# EAGLE board lia_teardrops (EAGLE 6.1), part 1 of 2
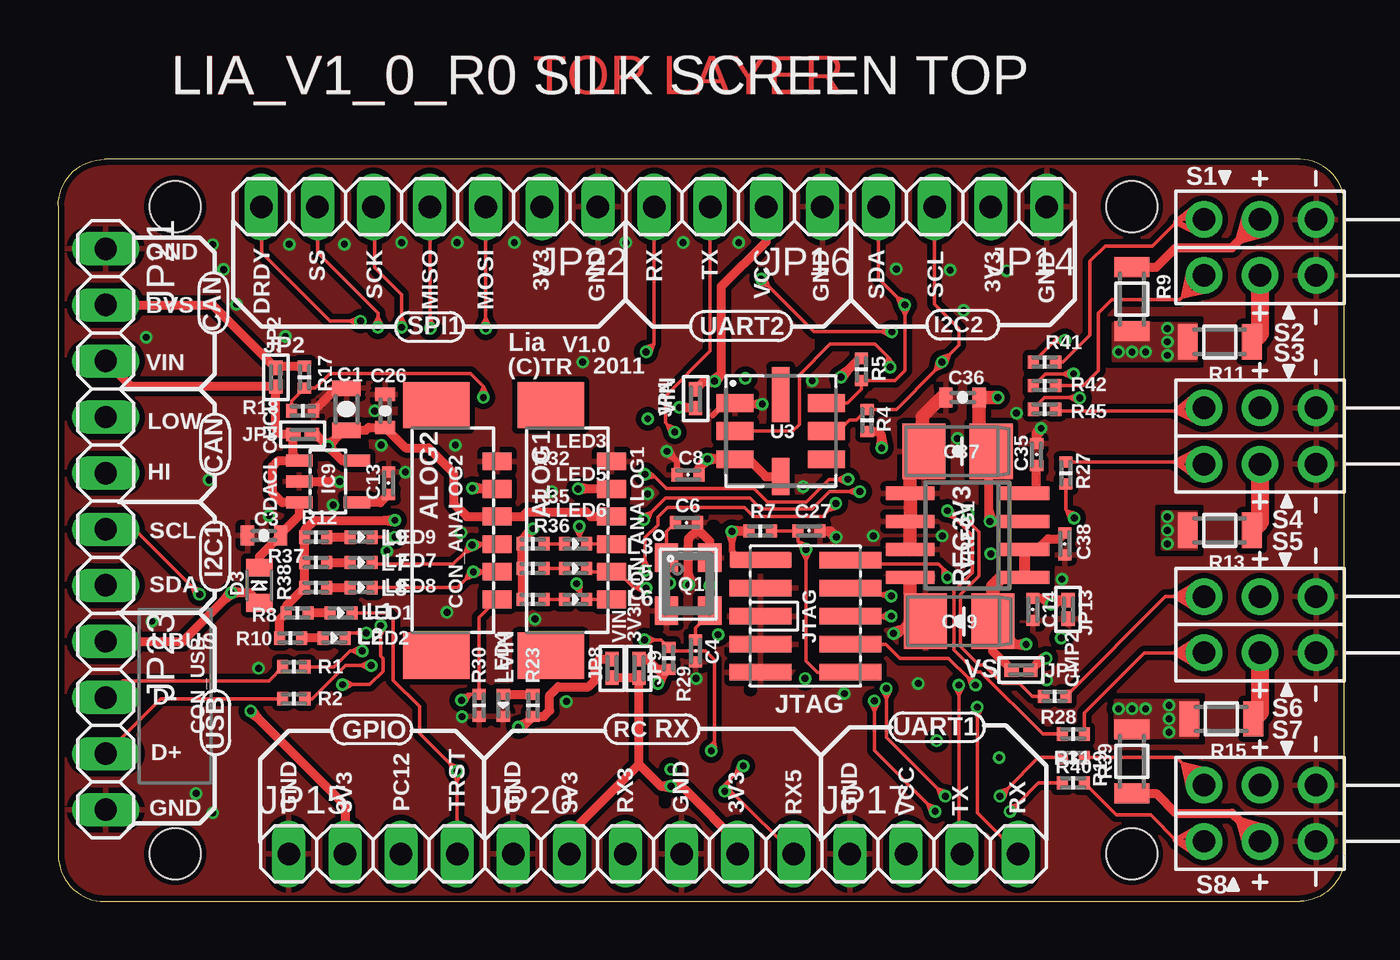
[diagram p0: board, top side]
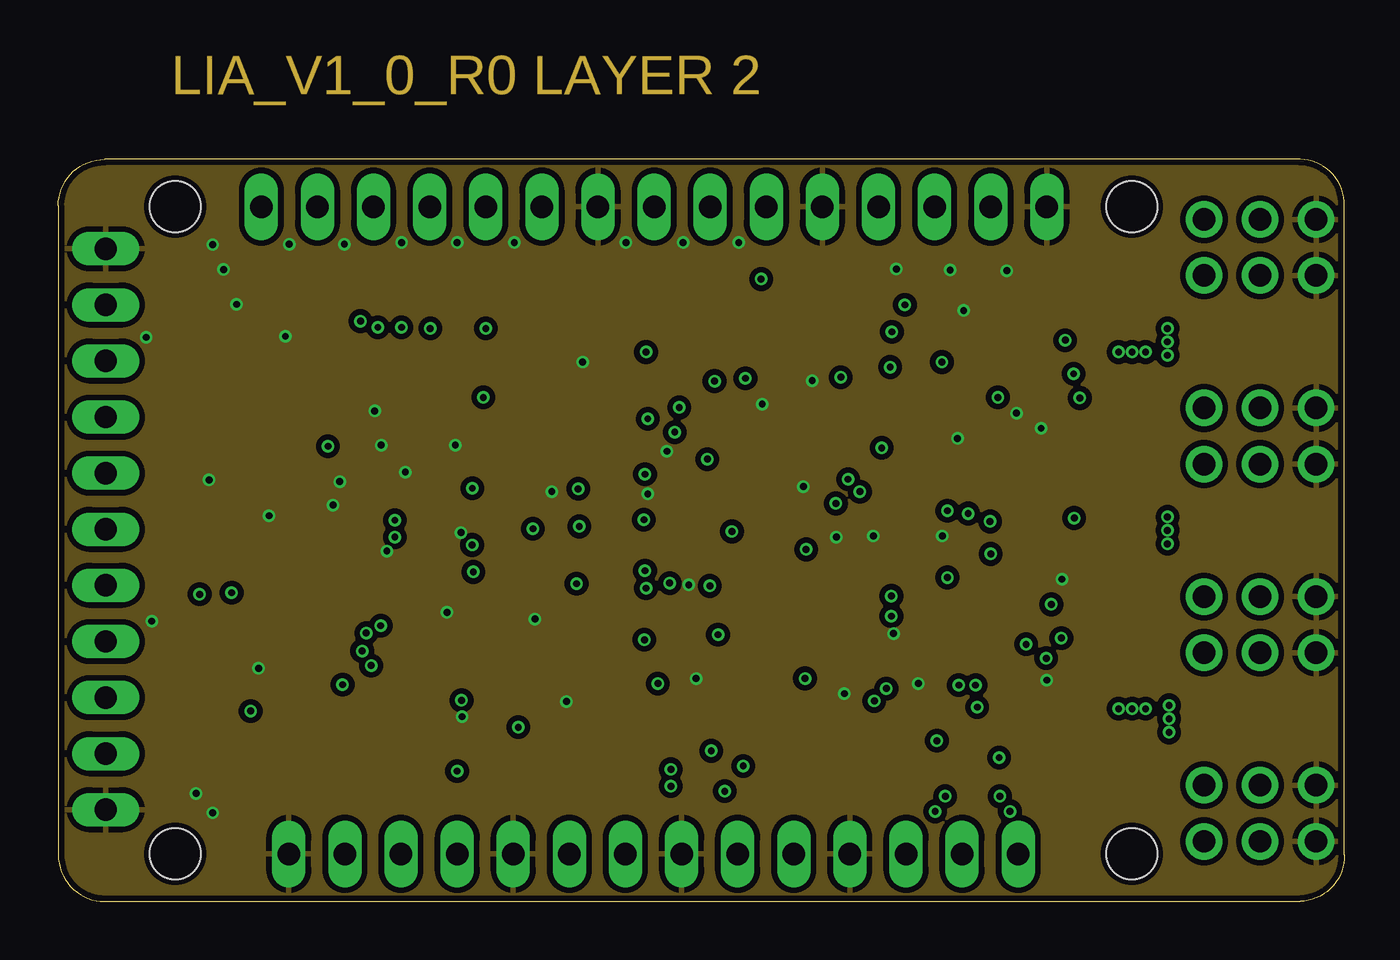
[diagram p1: board, inner layer Route2]
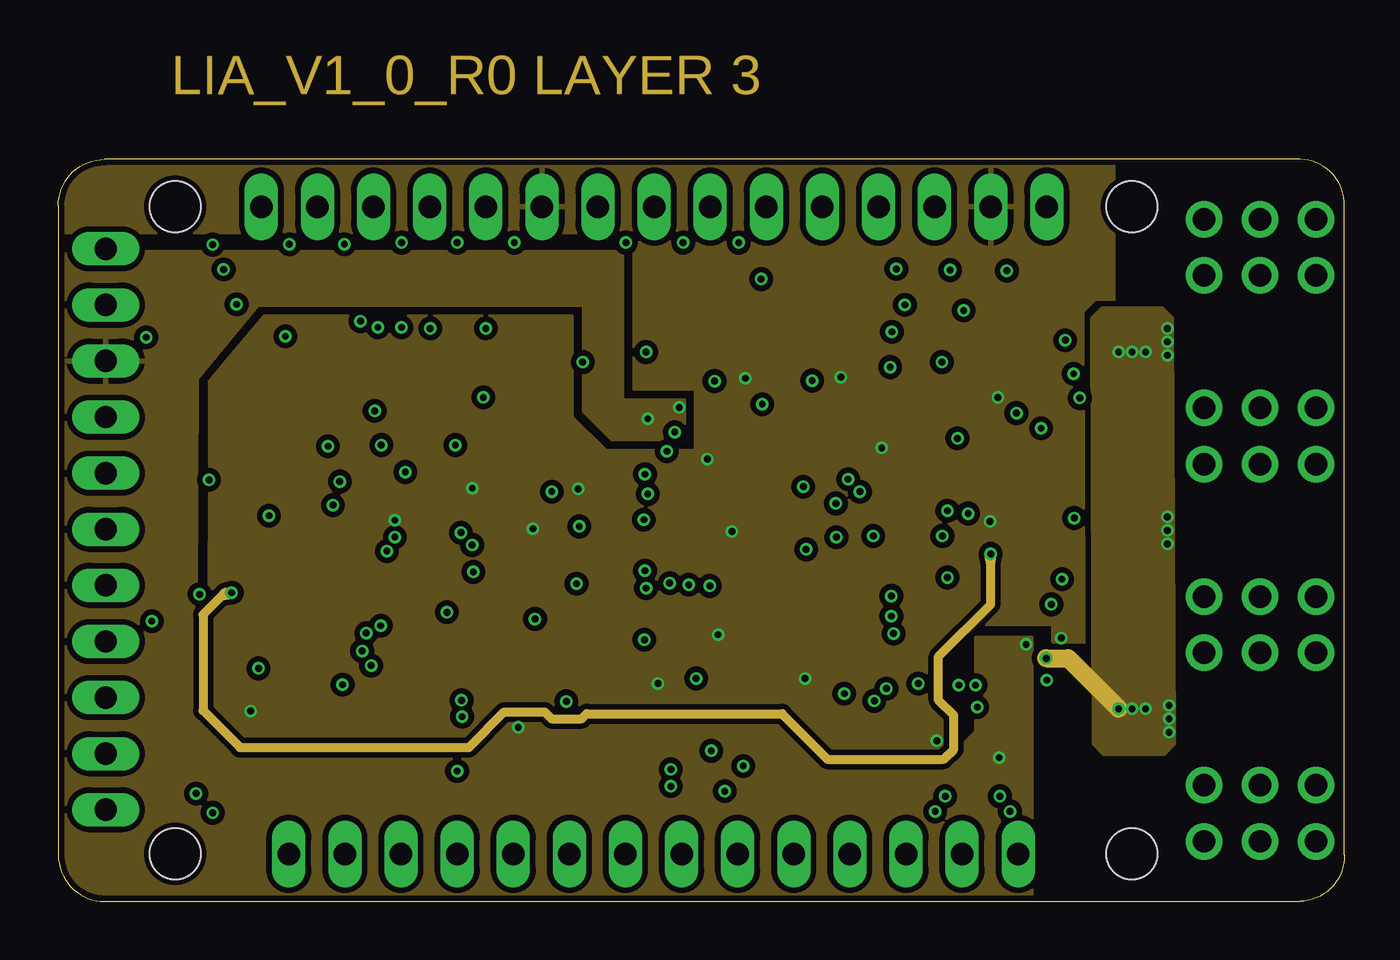
[diagram p2: board, inner layer Route15]
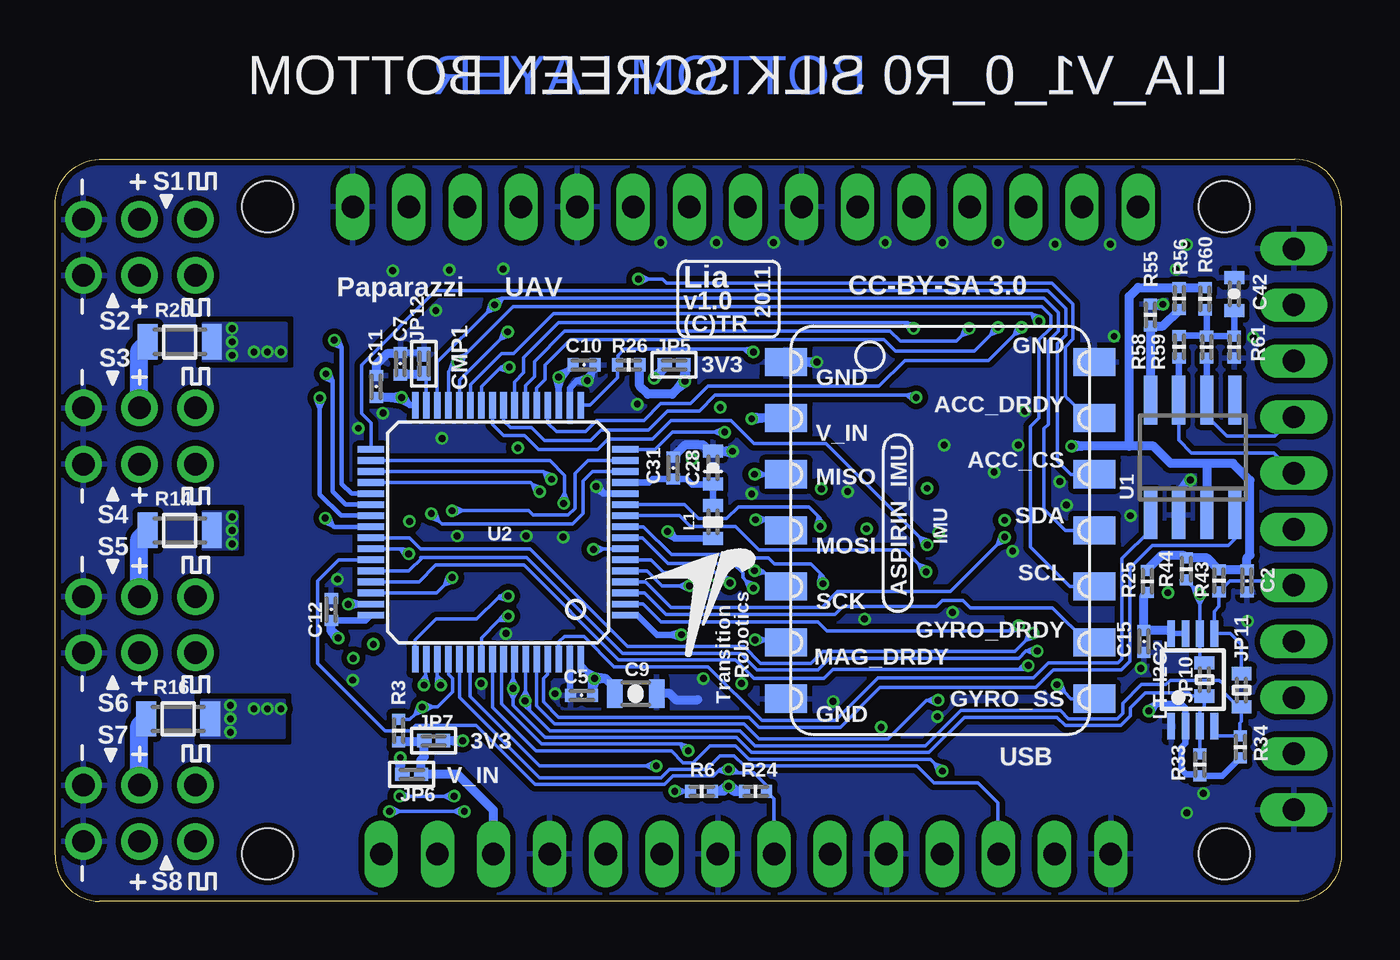
[diagram p3: board, bottom side, seen from below]

Size 58.22 x 33.6 mm. Coordinates in mm from the lower left corner, seen from the top.
Outline: 2.1,0 56.22,0 arc90 58.22,2.1 58.22,31.5 arc90 56.22,33.6 2.1,33.6 arc90 0,31.5 0,2.1 arc90 2.1,0
Copper layers (1*2+15*16): Top 0.035mm / dielectric 0.2mm / Route2 0.035mm / dielectric 1.5mm / Route15 0.035mm / dielectric 0.2mm / Bottom 0.035mm
Design rules: minimum track width 0.15mm, minimum drill 10mil, track to track 0.15mm, track to pad 0.15mm, pad to pad 0.15mm, via to via 0.15mm, smd to smd 0.15mm, copper to edge 10mil, drill to drill 8mil, minimum pad ring 5mil, minimum via ring 5mil, stop-mask expansion 14mil, vias tented up to drill 0.31mm, thermal gap 10mil
Net classes: 0 default: width 0.152 mm, drill 0.305 mm, clearance 0.152 mm
Holes 2.3 mm at 5.3,2.15 5.3,31.45 48.6,31.45 48.6,2.15
tKeepout: area 3.3,0.1 to 7.3,4.2; area 46.6,0.1 to 50.6,4.2; area 3.3,29.4 to 7.3,33.5; area 46.6,29.4 to 50.6,33.5
tRestrict: area 44.8,15.2 to 44.9,15.4; area 42.7,15.1 to 42.8,15.5; area 43.5,20.3 to 43.8,20.3; area 30.5,23.2 to 30.8,23.3; area 34.5,25.2 to 34.6,25.5; area 29.6,16.7 to 29.7,17; area 28.1,16.4 to 28.2,16.6; area 10.6,16.3 to 10.7,16.5; area 16.4,21 to 16.7,21.1; area 43.6,13 to 43.9,13.1; area 39,17.8 to 39.3,17.9; area 26,17.6 to 26.1,17.7; 12 more areas
bRestrict: area 5.5,26.9 to 5.7,27; area 11.1,23.5 to 11.3,23.6; area 6.7,16.8 to 6.8,17; area 8,16.8 to 8.1,17; area 8.3,10.4 to 8.4,10.6; area 14.9,12.8 to 15,13; area 30.7,20 to 30.8,20.2; area 33.7,24.7 to 33.9,24.9; area 34.5,9.9 to 34.6,10.1; area 31.6,18.4 to 31.7,18.6; area 31.5,9.3 to 31.6,9.5; area 28.9,19.5 to 29,19.6

## Footprints (pad centres in the part's own frame; a part is rotated, then mirrored left to right if it is on the bottom)
0805-CAP = smd 0.7 x 1.3: P$1 -0.95,0; P$2 0.95,0
0402-CAP = smd 0.5 x 0.6: P$1 -0.5,0; P$2 0.5,0
0603-CAP = smd 0.6 x 0.9: P$1 -0.75,0; P$2 0.75,0
0603-POL-CAP = smd 0.6 x 0.9: + -0.75,0; - 0.75,0
3528/B = smd 1.95 x 2.5: + -1.525,0; - 1.525,0
PB-53398-06 = smd 0.8 x 1.3: 1 -3.125,1.25; 2 -1.875,1.25; 3 -0.625,1.25; 4 0.625,1.25; 5 1.875,1.25; 6 3.125,1.25 | smd 2.1 x 3: PAD1 -5.675,-1.5; PAD2 5.675,-1.5
MICROMELF-R = smd 0.8 x 1.2: A 0.8,0; C -0.8,0
SOT23-5 = smd 0.55 x 1.2: 1 -0.95,-1.3; 2 0,-1.3; 3 0.95,-1.3; 4 0.95,1.3; 5 -0.95,1.3
ASPIRIN_1 = smd 1.905 x 1.27: P$1 -6.985,7.62; P$2 -6.985,5.08; P$3 -6.985,2.54; P$4 -6.985,0; P$5 -6.985,-2.54; P$6 -6.985,-5.08; P$7 -6.985,-7.62; P$8 6.985,-7.62; P$9 6.985,-5.08; P$10 6.985,-2.54; P$11 6.985,0; P$12 6.985,2.54; P$13 6.985,5.08; P$14 6.985,7.62
SIP1X3_100 = drill 1.016 pad 1.651: 1 2.54,0; 2 0,0; 3 -2.54,0
0402-SQJMP = smd 0.652 x 0.6: P$1 -0.424,0; P$2 0.424,0
0603-RES = smd 0.6 x 0.9: P$1 -0.75,0; P$2 0.75,0
1X04 = drill 1.016 long: 1 -3.81,0; 2 -1.27,0; 3 1.27,0; 4 3.81,0
1X06 = drill 1.016 long: 1 -6.35,0; 2 -3.81,0; 3 -1.27,0; 4 1.27,0; 5 3.81,0; 6 6.35,0
1X07 = drill 1.016 long: 1 -7.62,0; 2 -5.08,0; 3 -2.54,0; 4 0,0; 5 2.54,0; 6 5.08,0; 7 7.62,0
FTSH-105-DV = smd 0.74 x 2.8: 1 -2.54,-2.03; 2 -2.54,2.03; 3 -1.27,-2.03; 4 -1.27,2.03; 5 0,-2.03; 6 0,2.03; 7 1.27,-2.03; 8 1.27,2.03; 9 2.54,-2.03; 10 2.54,2.03
0603-IND = smd 0.6 x 0.9: P$1 -0.75,0; P$2 0.75,0
0402-LED = smd 0.5 x 0.6: A -0.5,0; C 0.5,0
TSSOP_B3 = smd 1.2 x 0.35: 1 -2.925,0.975; 2 -2.925,0.325; 3 -2.925,-0.325; 4 -2.925,-0.975; 5 1.275,-0.975; 6 1.275,-0.325; 7 1.275,0.325; 8 1.275,0.975
ABM8 = smd 1.3 x 1.05: P$1 -1.2,-0.975; P$2 1.2,-0.975; P$3 1.2,0.975; P$4 -1.2,0.975
0402-RES = smd 0.5 x 0.6: P$1 -0.5,0; P$2 0.5,0
1206-RES = smd 0.9 x 1.6: P$1 -1.45,0; P$2 1.45,0
SO-08 = smd 0.6 x 2.2: 1 -1.905,-2.6; 2 -0.635,-2.6; 3 0.635,-2.6; 4 1.905,-2.6; 5 1.905,2.6; 6 0.635,2.6; 7 -0.635,2.6; 8 -1.905,2.6
LQFP64 = smd 1.2 x 0.3: 1 -5.75,3.75; 2 -5.75,3.25; 3 -5.75,2.75; 4 -5.75,2.25; 5 -5.75,1.75; 6 -5.75,1.25; 7 -5.75,0.75; 8 -5.75,0.25; 9 -5.75,-0.25; 10 -5.75,-0.75; 11 -5.75,-1.25; 12 -5.75,-1.75; 13 -5.75,-2.25; 14 -5.75,-2.75; 15 -5.75,-3.25; 16 -5.75,-3.75; 33 5.75,-3.75; 34 5.75,-3.25; 35 5.75,-2.75; 36 5.75,-2.25; 37 5.75,-1.75; 38 5.75,-1.25; 39 5.75,-0.75; 40 5.75,-0.25; 41 5.75,0.25; 42 5.75,0.75; 43 5.75,1.25; 44 5.75,1.75; 45 5.75,2.25; 46 5.75,2.75; 47 5.75,3.25; 48 5.75,3.75 | smd 0.3 x 1.2: 17 -3.75,-5.75; 18 -3.25,-5.75; 19 -2.75,-5.75; 20 -2.25,-5.75; 21 -1.75,-5.75; 22 -1.25,-5.75; 23 -0.75,-5.75; 24 -0.25,-5.75; 25 0.25,-5.75; 26 0.75,-5.75; 27 1.25,-5.75; 28 1.75,-5.75; 29 2.25,-5.75; 30 2.75,-5.75; 31 3.25,-5.75; 32 3.75,-5.75; 49 3.75,5.75; 50 3.25,5.75; 51 2.75,5.75; 52 2.25,5.75; 53 1.75,5.75; 54 1.25,5.75; 55 0.75,5.75; 56 0.25,5.75; 57 -0.25,5.75; 58 -0.75,5.75; 59 -1.25,5.75; 60 -1.75,5.75; 61 -2.25,5.75; 62 -2.75,5.75; 63 -3.25,5.75; 64 -3.75,5.75
LCC8 = smd 1.67 x 0.8: 1 -2.065,1.27; 2 -2.065,0; 3 -2.065,-1.27; 5 2.065,-1.27; 6 2.065,0; 7 2.065,1.27 | smd 0.8 x 1.67: 4 0,-2.065 | smd 0.8 x 2.5: 8 0,1.65
SOIC8 = smd 0.6 x 2.2: 1 -1.905,-2.6; 2 -0.635,-2.6; 3 0.635,-2.6; 4 1.905,-2.6; 5 1.905,2.6; 6 0.635,2.6; 7 -0.635,2.6; 8 -1.905,2.6

## Placement (x,y rotation side)
C1  4u7  [0805-CAP]  13.05,22.29 90 top
C2  100n  [0402-CAP]  4.27,14.51 270 bottom
C3  100n  [0603-CAP]  9.32,16.57 180 top
C4  30p  [0402-CAP]  28.85,11.34 90 top
C5  100n  [0402-CAP]  34.39,9.33 0 bottom
C6  30p  [0402-CAP]  28.45,17.15 0 top
C7  100n  [0402-CAP]  42.6,24.34 270 bottom
C8  100n  [0402-CAP]  28.52,19.31 0 top
C9  4u7  [0805-CAP]  31.95,9.41 0 bottom
C10  100n  [0402-CAP]  34.28,24.29 180 bottom
C11  100n  [0402-CAP]  43.69,23.31 270 bottom
C12  100n  [0402-CAP]  45.72,13.22 270 bottom
C13  10n  [0402-CAP]  14.95,18.93 90 top
C14  100n  [0402-CAP]  44.12,13.22 90 top
C15  100n  [0402-CAP]  8.93,11.77 270 bottom
C26  100n  [0603-CAP]  14.8,22.21 90 top
C27  100n  [0402-CAP]  33.99,16.77 180 top
C28  1u  [0603-POL-CAP]  28.44,19.64 90 bottom
C31  10n  [0402-CAP]  30.25,19.62 270 bottom
C35  470p  [0402-CAP]  44.29,20.23 90 top
C36  100n  [0603-CAP]  40.94,22.82 180 top
C37  22u  [3528/B]  40.71,20.38 180 top
C38  100n  [0402-CAP]  45.57,16.19 270 top
C39  22u  [3528/B]  40.79,12.68 180 top
C42  4n7  [0603-CAP]  4.85,27.5 270 bottom
CON_ANALOG1  [PB-53398-06]  23.79,16.8 270 top
CON_ANALOG2  [PB-53398-06]  18.61,16.8 270 top
D3  1N5819  [MICROMELF-R]  9.11,14.31 270 top
IC9  LP2992 5V  [SOT23-5]  12.21,19.01 270 top
IMU  ASPIRIN  [ASPIRIN_1]  18.16,16.8 0 bottom
J1  CONN_3-1  [SIP1X3_100]  54.41,30.88 0 top
J2  CONN_3-1  [SIP1X3_100]  54.41,28.34 0 top
J3  CONN_3-1  [SIP1X3_100]  54.41,22.34 0 top
J4  CONN_3-1  [SIP1X3_100]  54.41,19.8 0 top
J5  CONN_3-1  [SIP1X3_100]  54.41,13.8 0 top
J6  CONN_3-1  [SIP1X3_100]  54.41,11.26 0 top
J7  CONN_3-1  [SIP1X3_100]  54.41,5.26 0 top
J8  CONN_3-1  [SIP1X3_100]  54.41,2.72 0 top
JP1  0/DNP  [0402-SQJMP]  43.59,10.47 180 top
JP2  0/DNP  [0402-SQJMP]  9.85,23.73 90 top
JP3  0/DNP  [0402-SQJMP]  11.07,21.14 0 top
JP4  0/DNP  [0402-SQJMP]  28.85,22.76 90 top
JP5  0/DNP  [0402-SQJMP]  30.21,24.29 0 bottom
JP6  0/DNP  [0402-SQJMP]  42.08,5.75 0 bottom
JP7  0/DNP  [0402-SQJMP]  41.09,7.27 180 bottom
JP8  0/DNP  [0402-SQJMP]  25.07,10.55 270 top
JP9  0/DNP  [0402-SQJMP]  26.29,10.55 270 top
JP10  0/DNP  [0603-RES]  6.19,10.04 90 bottom
JP11  0/DNP  [0603-RES]  4.52,9.56 90 bottom
JP12  0/DNP  [0402-SQJMP]  41.53,24.34 90 bottom
JP13  0/DNP  [0402-SQJMP]  45.72,13.22 270 top
JP14  [1X04]  40.94,31.45 180 top
JP15  [1X04]  14.25,2.15 0 top
JP16  [1X04]  30.78,31.45 180 top
JP17  [1X04]  39.65,2.15 0 top
JP20  [1X06]  26.95,2.15 0 top
JP21  [1X07]  2.15,21.93 270 top
JP22  [1X07]  16.81,31.45 180 top
JP23  [1X04]  2.15,7.96 270 top
JTAG  PIN_HDR_EDG_1.27MM_5-2  [FTSH-105-DV]  33.83,12.91 270 top
L1  [0603-IND]  28.44,17.18 90 bottom
LED1  RED  [0402-LED]  12.8,13.07 0 top
LED2  BLU  [0402-LED]  12.5,11.92 0 top
LED3  BLU  [0402-LED]  23.42,16.19 0 top
LED4  ORG  [0402-LED]  20.15,8.87 270 top
LED5  BLU  [0402-LED]  23.42,15.07 0 top
LED6  BLU  [0402-LED]  23.42,13.68 0 top
LED7  BLU  [0402-LED]  13.72,15.35 0 top
LED8  BLU  [0402-LED]  13.72,14.21 0 top
LED9  BLU  [0402-LED]  13.72,16.49 0 top
LT_I2C2  PCA9306DP  [TSSOP_B3]  6.72,10.86 90 bottom
Q1  12Mhz  [ABM8]  28.52,14.36 270 top
R1  22R  [0402-RES]  10.67,10.63 0 top
R2  22R  [0402-RES]  10.67,9.18 0 top
R3  2k7  [0402-RES]  42.67,7.73 90 bottom
R4  2k7  [0402-RES]  36.62,21.78 90 top
R5  2k7  [0402-RES]  36.37,24.09 270 top
R6  2k7  [0402-RES]  28.96,4.99 180 bottom
R7  10k  [0402-RES]  31.78,16.77 180 top
R8  300R  [0402-RES]  10.82,13.07 180 top
R9  1R  [1206-RES]  48.6,27.26 270 top
R10  80R  [0402-RES]  10.52,11.92 180 top
R11  1R  [1206-RES]  52.58,25.33 180 top
R12  80R  [0402-RES]  11.66,16.49 180 top
R13  1R  [1206-RES]  52.58,16.8 180 top
R14  1R  [1206-RES]  52.58,16.8 0 bottom
R15  1R  [1206-RES]  52.65,8.26 180 top
R16  1R  [1206-RES]  52.65,8.26 0 bottom
R17  10k  [0402-RES]  11.14,23.73 270 top
R18  2k  [0402-RES]  11.07,22.21 0 top
R19  1R  [1206-RES]  48.6,6.33 90 top
R20  1R  [1206-RES]  52.58,25.33 0 bottom
R23  2k  [0402-RES]  21.49,8.87 270 top
R24  2k7  [0402-RES]  26.52,4.99 0 bottom
R25  200k  [0402-RES]  8.78,14.49 90 bottom
R26  2k7  [0402-RES]  32.26,24.29 180 bottom
R27  100R  [0402-RES]  45.62,19.39 270 top
R28  100R  [0402-RES]  45.11,9.28 180 top
R29  2k7  [0402-RES]  27.63,11.01 90 top
R30  2k7  [0402-RES]  19.05,8.87 90 top
R31  100R  [0402-RES]  45.95,7.58 180 top
R32  80R  [0402-RES]  21.49,16.19 180 top
R33  2k7  [0402-RES]  6.4,6.19 270 bottom
R34  2k7  [0402-RES]  4.57,6.99 270 bottom
R35  80R  [0402-RES]  21.49,15.07 180 top
R36  80R  [0402-RES]  21.49,13.68 180 top
R37  80R  [0402-RES]  11.66,15.35 180 top
R38  80R  [0402-RES]  11.66,14.21 180 top
R39  100R  [0402-RES]  45.95,6.51 180 top
R40  100R  [0402-RES]  45.95,5.37 180 top
R41  100R  [0402-RES]  44.65,24.42 180 top
R42  100R  [0402-RES]  44.65,23.35 180 top
R43  1k5  [0402-RES]  5.54,14.51 90 bottom
R44  1k5  [0402-RES]  7.01,15.05 90 bottom
R45  100R  [0402-RES]  44.65,22.29 180 top
R55  0/10k  [0402-RES]  8.64,26.55 270 bottom
R56  0/DNP  [0402-RES]  7.34,27.3 90 bottom
R58  60R/DNP  [0402-RES]  7.34,25.11 90 bottom
R59  60R/DNP  [0402-RES]  6.1,25.1 270 bottom
R60  4k7/DNP  [0402-RES]  6.17,27.28 270 bottom
R61  4k7/DNP  [0402-RES]  4.85,25.1 270 bottom
U1  MCP2551SN  [SO-08]  6.72,20.1 0 bottom
U2  STM32-C-64  [LQFP64]  38.17,16.71 180 bottom
U3  BMP085  [LCC8]  32.71,21.3 0 top
U$1  TR-LOGO  [TR-LOGO]  29.02,13.51 0 bottom
VREG1  MIC5209  [SOIC8]  41.17,16.57 90 top

## Library data of the parts
C1 = pel_dipol_comp; DNP: T; PARTNO: C2012Y5V1C475Z/1.25
C2 C8 C15 = pel_dipol_comp; DNP: T; PARTNO: LMK105BJ104KV-F
C3 C26 = pel_dipol_comp; DNP: T; PARTNO: C0603C104K5RACTU
C4 C6 = pel_dipol_comp; PARTNO: C1005C0G1H300J
C5 C7 C10-C12 C14 C27 C38 = pel_dipol_comp; PARTNO: LMK105BJ104KV-F
C9 = pel_dipol_comp; PARTNO: C2012Y5V1C475Z/1.25
C13 = pel_dipol_comp; DNP: T; PARTNO: CC0402KRX7R9BB103
C28 = pel_dipol_comp; PARTNO: F981E105MMA
C31 = pel_dipol_comp; PARTNO: CC0402KRX7R9BB103
C35 = pel_dipol_comp; PARTNO: CC0402KRX7R9BB471
C36 = pel_dipol_comp; PARTNO: C0603C104K5RACTU
C37 C39 = pel_dipol_comp; PARTNO: T491B226M016AT
C42 = pel_dipol_comp; DNP: T; PARTNO: C0603C472K5RACTU
CON_ANALOG1 CON_ANALOG2 = pel_molex; DNP: T; PARTNO: 53398-0671
D3 = diode; PARTNO: RB160SS-40T2R
IC9 = open-bldc; DNP: T; PARTNO: LP2992IM5-5.0/NOPB
IMU = joby_robotics; PARTNO: ASP6000
J1-J8 = pel_misc; PARTNO: TSW-102-08-T-T-RA
JP1-JP4 JP7 JP8 = pel_jumpers; DNP: T; PARTNO: RC0402JR-070RL
JP5 JP6 JP9 JP12 JP13 = pel_jumpers; PARTNO: RC0402JR-070RL
JP10 JP11 R55 = pel_dipol_comp; DNP: T; PARTNO: RC0603JR-070RL
JP14-JP17 JP20-JP23 = pinhead; DNP: T
JTAG = pel_misc; DNP: T; PARTNO: FTSH-105-01-F-DV-K-P-TR
L1 = res_cap; PARTNO: MMZ1608B601C
LED1 = pel_dipol_comp; PARTNO: SML-P11UTT86
LED2 LED7-LED9 = pel_dipol_comp; PARTNO: SMLP12BC7TT86
LED3 LED5 LED6 = pel_dipol_comp; DNP: T; PARTNO: SMLP12BC7TT86
LED4 = pel_dipol_comp; PARTNO: SML-P11DTT86
LT_I2C2 = booz; DNP: T; PARTNO: PCA9306DP,118
Q1 = booz; PARTNO: ABM8-12.000MHZ-B2-T
R1 R2 = pel_dipol_comp; PARTNO: ERJ-2GEJ220X
R3-R6 R24 R26 R29 R30 = pel_dipol_comp; PARTNO: RMCF0402JT2K70
R7 R17 = pel_dipol_comp; PARTNO: RMCF0402JT10K0
R8 R10 R12 R37 R38 = pel_dipol_comp; PARTNO: RMCF0402JT470R
R9 R11 R13-R16 R19 R20 R27 R28 R31 R39-R42 R45 = pel_dipol_comp; PARTNO: RC0402JR-07100RL
R18 = pel_dipol_comp; PARTNO: RMCF0402FT2K00
R23 = pel_dipol_comp; PARTNO: RMCF0402JT1K50
R25 = pel_dipol_comp; DNP: T; PARTNO: RC0402JR-07200KL
R32 R35 R36 = pel_dipol_comp; DNP: T; PARTNO: RMCF0402JT470R
R33 R34 = pel_dipol_comp; DNP: T; PARTNO: RMCF0402JT2K70
R43 R44 = pel_dipol_comp; DNP: T; PARTNO: RMCF0402JT1K50
R56 = pel_dipol_comp; DNP: T; PARTNO: RC0402JR-070RL
R58 R59 = pel_dipol_comp; DNP: T; PARTNO: ERJ-2RKF60R4X
R60 R61 = pel_dipol_comp; DNP: T; PARTNO: RMCF0402JT4K70
U1 = microchip_can; DNP: T; PARTNO: MCP2551-I/SN
U2 = pel_stm32; FLASH: 256KB; PARTNO: STM32F105RCT6; PART_NR: STM32F105RCT6; RAM: 64KB
U3 = omc; DNP: T; PARTNO: BMP085
U$1 = quadshot; BOM: EXCLUDE; PARTNO: *
VREG1 = paparazzi; PARTNO: MIC5209-3.3YM

## Nets
+3V3: C5.P$2 C8.P$2 C9.P$1 C10.P$2 C11.P$2 C12.P$2 C36.P$1 C37.+ CON_ANALOG1.2 CON_ANALOG2.2 JP5.P$1 JP7.P$1 JP9.P$1 JP14.2 JP15.2 JP22.2 JTAG.1 L1.P$1 LT_I2C2.2 R4.P$1 R5.P$1 R7.P$2 R8.P$2 R10.P$2 R12.P$2 R29.P$1 R32.P$2 R33.P$2 R34.P$2 R35.P$2 R36.P$2 R37.P$2 R38.P$2 U2.1 U2.19 U2.32 U2.48 U2.64 U3.3 U3.4 VREG1.3
+5V: C1.P$1 C2.P$1 C26.P$1 CON_ANALOG1.3 CON_ANALOG2.3 IC9.5 JP3.P$2 R25.P$2 R43.P$2 R44.P$2 R56.P$2 R60.P$1 U1.3
ADC_1: CON_ANALOG1.4 LED3.C U2.11
ADC_2: CON_ANALOG1.5 LED5.C U2.8
ADC_3: CON_ANALOG1.6 LED6.C U2.9
ADC_4: CON_ANALOG2.4 LED7.C U2.25
ADC_6: CON_ANALOG2.5 LED8.C U2.10
BARO_DRDY: U2.26 U3.2
BOOT0: CON_ANALOG2.6 R30.P$2 U2.60
CAN_CENTER: C42.P$2 R58.P$2 R59.P$1 R60.P$2 R61.P$1
CAN_H: JP21.5 R58.P$1 U1.7
CAN_L: JP21.4 R59.P$2 U1.6
CAN_RX: U1.4 U2.61
CAN_TX: U1.1 U2.62
EXTSPI_DRDY: JP22.7 U2.27
EXTSPI_MISO: JP22.4 U2.22
EXTSPI_MOSI: JP22.3 U2.23
EXTSPI_SCK: JP22.5 U2.21
EXTSPI_SS: JP22.6 U2.20
FT_USB_DM: JP23.2 R1.P$1
FT_USB_DP: JP23.3 R2.P$1
GND: C1.P$2 C2.P$2 C3.P$2 C4.P$1 C5.P$1 C6.P$2 C7.P$1 C8.P$1 C9.P$2 C10.P$1 C11.P$1 C12.P$1 C13.P$2 C14.P$1 C15.P$2 C26.P$2 C27.P$1 C28.- C31.P$1 C35.P$2 C36.P$2 C37.- C38.P$2 C39.- C42.P$1 CON_ANALOG1.1 CON_ANALOG2.1 IC9.2 IMU.P$1 IMU.P$7 IMU.P$14 J1.1 J2.1 J3.1 J4.1 J5.1 J6.1 J7.1 J8.1 JP12.P$2 JP13.P$2 JP14.1 JP15.1 JP16.1 JP17.1 JP20.1 JP20.4 JP21.1 JP22.1 JP23.4 JTAG.3 JTAG.5 JTAG.7 JTAG.9 LED4.C LT_I2C2.1 Q1.P$2 Q1.P$4 R18.P$2 R30.P$1 R55.P$1 R61.P$2 U1.2 U2.12 U2.18 U2.63 U3.1 VREG1.5 VREG1.6 VREG1.7 VREG1.8
I2C2_SCL: IMU.P$10 JP14.3 R4.P$2 U2.29 U3.6
I2C2_SDA: IMU.P$11 JP14.4 R5.P$2 U2.30 U3.7
IMU_ACC_CS: IMU.P$12 U2.33
IMU_ACC_DRDY: IMU.P$13 U2.28
IMU_GYRO_DRDY: IMU.P$9 U2.3
IMU_GYRO_SS: IMU.P$8 U2.2
IMU_MAG_DRDY: IMU.P$6 R29.P$2 U2.57
IMU_SPI_MISO: IMU.P$3 U2.35
IMU_SPI_MOSI: IMU.P$4 U2.36
IMU_SPI_SCK: IMU.P$5 U2.34
JTAG_RST: C27.P$2 JTAG.10 R7.P$1 U2.7
JTAG_TCK: JTAG.4 U2.49
JTAG_TDI: JTAG.8 U2.50
JTAG_TDO: JTAG.6 U2.55
JTAG_TMS: JTAG.2 U2.46
JTAG_TRST: JP15.4 LED1.C U2.56
LED1: LED2.C U2.41
LED2: LED9.C U2.4
LT_I2C1_SCL: JP10.P$2 JP21.6 LT_I2C2.6 R44.P$1
LT_I2C1_SDA: JP11.P$2 JP21.7 LT_I2C2.5 R43.P$1
N$1: R55.P$2 R56.P$1 U1.8
N$2: J5.2 R14.P$1
N$3: J6.2 R15.P$1
N$4: LED2.A R10.P$1
N$5: LED3.A R32.P$1
N$6: C13.P$1 IC9.4
N$7: C35.P$1 VREG1.4
N$8: C15.P$1 LT_I2C2.7 LT_I2C2.8 R25.P$1
N$9: LED5.A R35.P$1
N$10: LED1.A R8.P$1
N$11: LED6.A R36.P$1
N$12: LED4.A R23.P$1
N$13: LED9.A R12.P$1
N$14: LED7.A R37.P$1
N$15: LED8.A R38.P$1
N$16: J7.2 R16.P$1
N$17: J8.2 R19.P$1
N$18: J4.2 R13.P$1
N$19: J3.2 R20.P$1
N$20: J2.2 R11.P$1
N$21: J1.2 R9.P$1
OSC_IN: C4.P$2 Q1.P$3 U2.5
OSC_OUT: C6.P$1 Q1.P$1 U2.6
PC12: JP15.3 U2.53
S1: J1.3 R41.P$1
S2: J2.3 R42.P$1
S3: J3.3 R45.P$1
S4: J4.3 R27.P$1
S5: J5.3 R28.P$1
S6: J6.3 R31.P$1
S7: J7.3 R39.P$1
S8: J8.3 R40.P$1
SERVO_1: R41.P$2 U2.37
SERVO_2: R42.P$2 U2.38
SERVO_3: R45.P$2 U2.39
SERVO_4: R27.P$2 U2.40
SERVO_5: R28.P$2 U2.14
SERVO_6: R31.P$2 U2.15
SERVO_7/I2C1_SCL: JP10.P$1 LT_I2C2.3 R33.P$1 R39.P$2 U2.58
SERVO_8/I2C1_SDA: JP11.P$1 LT_I2C2.4 R34.P$1 R40.P$2 U2.59
SERVO_BUS: JP1.P$1 R9.P$2 R11.P$2 R13.P$2 R14.P$2 R15.P$2 R16.P$2 R19.P$2 R20.P$2
U1_U5_POW: JP8.P$2 JP9.P$2 JP20.2 JP20.5 R6.P$1 R24.P$1
U2_POW: JP4.P$2 JP5.P$2 JP16.2 R26.P$1
U3_POW: JP6.P$2 JP7.P$2 JP17.2 R3.P$1
UART1_RX: JP20.3 R24.P$2 U2.43
UART2_RX: JP16.4 R26.P$2 U2.17
UART2_TX: JP16.3 U2.16
UART3_RX: JP17.4 R3.P$2 U2.52
UART3_TX: JP17.3 U2.51
UART5_RX: JP20.6 R6.P$2 U2.54
USB_DM: R1.P$2 U2.44
USB_DP: R2.P$2 U2.45
USB_VBUS: D3.A JP23.1 U2.42
V_BAT: JP2.P$2 JP21.2 R17.P$1
V_BAT_MEAS: R17.P$2 R18.P$1 U2.24
V_IN: C3.P$1 C38.P$1 C39.+ D3.C IC9.1 IC9.3 IMU.P$2 JP1.P$2 JP2.P$1 JP3.P$1 JP4.P$1 JP6.P$1 JP8.P$1 JP21.3 R23.P$2 VREG1.1 VREG1.2
VDDA: C28.+ C31.P$2 L1.P$2 U2.13
VREF: U1.5
VSS1: C7.P$2 JP12.P$1 U2.31
VSS2: C14.P$2 JP13.P$1 U2.47